# EAGLE board Line_Following_Robot_D4 (EAGLE 9.7.0)

Size 326.07 x 161.37 mm. Coordinates in mm from the lower left corner, seen from the top.
Outline: 0,0 326.07,0 326.07,161.37 0,161.37 0,0
Copper layers (1*16): Top 0.035mm / dielectric 1.5mm / Bottom 0.035mm
Design rules "default": minimum track width 6mil, minimum drill 0.35mm, track to track 6mil, track to pad 6mil, pad to pad 6mil, via to via 6mil, smd to smd 6mil, copper to edge 40mil, drill to drill 6mil, minimum pad ring 10mil, minimum via ring 8mil, stop-mask expansion 4mil, vias tented up to drill 0mil, thermal gap 10mil

## Footprints (pad centres in the part's own frame; a part is rotated, then mirrored left to right if it is on the bottom)
BATTERY-GENERIC = drill 1.118 pad 3.15 octagon: + 2.54,0; - -2.54,0
HC-SR04 = drill 1.016 long: 1 -3.81,0; 2 -1.27,0; 3 1.27,0; 4 3.81,0
MOTOR = drill 1.118 pad 3.15 octagon: + 2.54,0; - -2.54,0
28027 = drill 1.016 long: 1 -2.54,0; 2 0,0; 3 2.54,0
DIP762W53P254L1969H508Q16B = drill 0.743 pad 1.343: 1 -3.81,8.89; 2 -3.81,6.35; 3 -3.81,3.81; 4 -3.81,1.27; 5 -3.81,-1.27; 6 -3.81,-3.81; 7 -3.81,-6.35; 8 -3.81,-8.89; 9 3.81,-8.89; 10 3.81,-6.35; 11 3.81,-3.81; 12 3.81,-1.27; 13 3.81,1.27; 14 3.81,3.81; 15 3.81,6.35; 16 3.81,8.89
ARDUINO-UNO-R3-SHIELD = drill 1.016 pad 1.88: 3.3V 24.13,-2.54; 5V 24.13,0; A0 24.13,12.7; A1 24.13,15.24; A2 24.13,17.78; A3 24.13,20.32; A4 24.13,22.86; A5 24.13,25.4; AREF -24.13,-13.97; D2 -24.13,20.32; D3 -24.13,17.78; D4 -24.13,15.24; D5 -24.13,12.7; D6 -24.13,10.16; D7 -24.13,7.62; D8 -24.13,3.81; D9 -24.13,1.27; D10 -24.13,-1.27; D11 -24.13,-3.81; D12 -24.13,-6.35; D13 -24.13,-8.89; GND@0 24.13,2.54; GND@1 24.13,5.08; GND@2 -24.13,-11.43; IOREF 24.13,-7.62; NC 24.13,-10.16; RES 24.13,-5.08; RX -24.13,25.4; SCL -24.13,-19.05; SDA -24.13,-16.51; TX -24.13,22.86; VIN 24.13,7.62

## Placement (x,y rotation side)
BAT1  9V  [BATTERY-GENERIC]  162.41,8.26 270 top
DIST1  DISTANCE-SENSOR-4PINHC-SR04  [HC-SR04]  228.94,140.45 0 top
DIST2  DISTANCE-SENSOR-4PINHC-SR04  [HC-SR04]  232,53.91 0 top
M1  MOTOR_HDR  [MOTOR]  100.58,43.13 0 top
M2  MOTOR_HDR  [MOTOR]  105.25,153.12 0 top
PIR1  PIR-SENSOR_28027  [28027]  304.6,149.67 0 top
PIR2  PIR-SENSOR_28027  [28027]  305.12,94.08 0 top
U1  L293E  [DIP762W53P254L1969H508Q16B]  104.03,105.74 90 top
U3  ARDUINO-UNO-R3-SHIELD  [ARDUINO-UNO-R3-SHIELD]  47.88,98.55 270 top

## Library data of the parts
BAT1 DIST1 DIST2 M1 M2 PIR1 PIR2 U1 U3 = Tinkercad

## Nets
BAT1+: BAT1.+ U1.8
BAT1-: BAT1.- DIST1.4 DIST2.4 PIR1.3 PIR2.3 U1.4 U1.5 U1.12 U1.13 U3.GND@0 U3.GND@1 U3.GND@2
M1_+: M1.+ U1.3
M1_-: M1.- U1.6
M2_+: M2.+ U1.11
M2_-: M2.- U1.14
U3_5V: DIST1.1 DIST2.1 PIR1.2 PIR2.2 U1.16 U3.5V
U3_A0: DIST2.2 U3.A0
U3_A1: DIST2.3 U3.A1
U3_A2: DIST1.2 U3.A2
U3_A3: DIST1.3 U3.A3
U3_D2: PIR1.1 U3.D2
U3_D3: PIR2.1 U3.D3
U3_D5: U1.1 U3.D5
U3_D6: U1.2 U3.D6
U3_D7: U1.7 U3.D7
U3_D8: U1.10 U3.D8
U3_D9: U1.15 U3.D9
U3_D10: U1.9 U3.D10

## Tracks (layer width: path | path; a pad name or v marks a point on that pad's centre or on a via)
BAT1+  (1 unrouted)
BAT1-  (11 unrouted)
M1_+  (1 unrouted)
M1_-  (1 unrouted)
M2_+  (1 unrouted)
M2_-  (1 unrouted)
U3_5V  (5 unrouted)
U3_A0  (1 unrouted)
U3_A1  (1 unrouted)
U3_A2  (1 unrouted)
U3_A3  (1 unrouted)
U3_D2  (1 unrouted)
U3_D3  (1 unrouted)
U3_D5  (1 unrouted)
U3_D6  (1 unrouted)
U3_D7  (1 unrouted)
U3_D8  (1 unrouted)
U3_D9  (1 unrouted)
U3_D10  (1 unrouted)